# Altium PCB ДФТВ.434519.003.101.PcbDoc (part 3 of 3)
Units mm, origin at the board's own origin, x right, y up, seen from the top; angles counter-clockwise.
Board outline 82.5 x 70 mm, 2 copper layers (Top Layer, Bottom Layer), stack 1.491 mm thick; 90 components, 67 nets, 446 pads, 341 vias.
Unrouted connection lines stored in the file: 55.
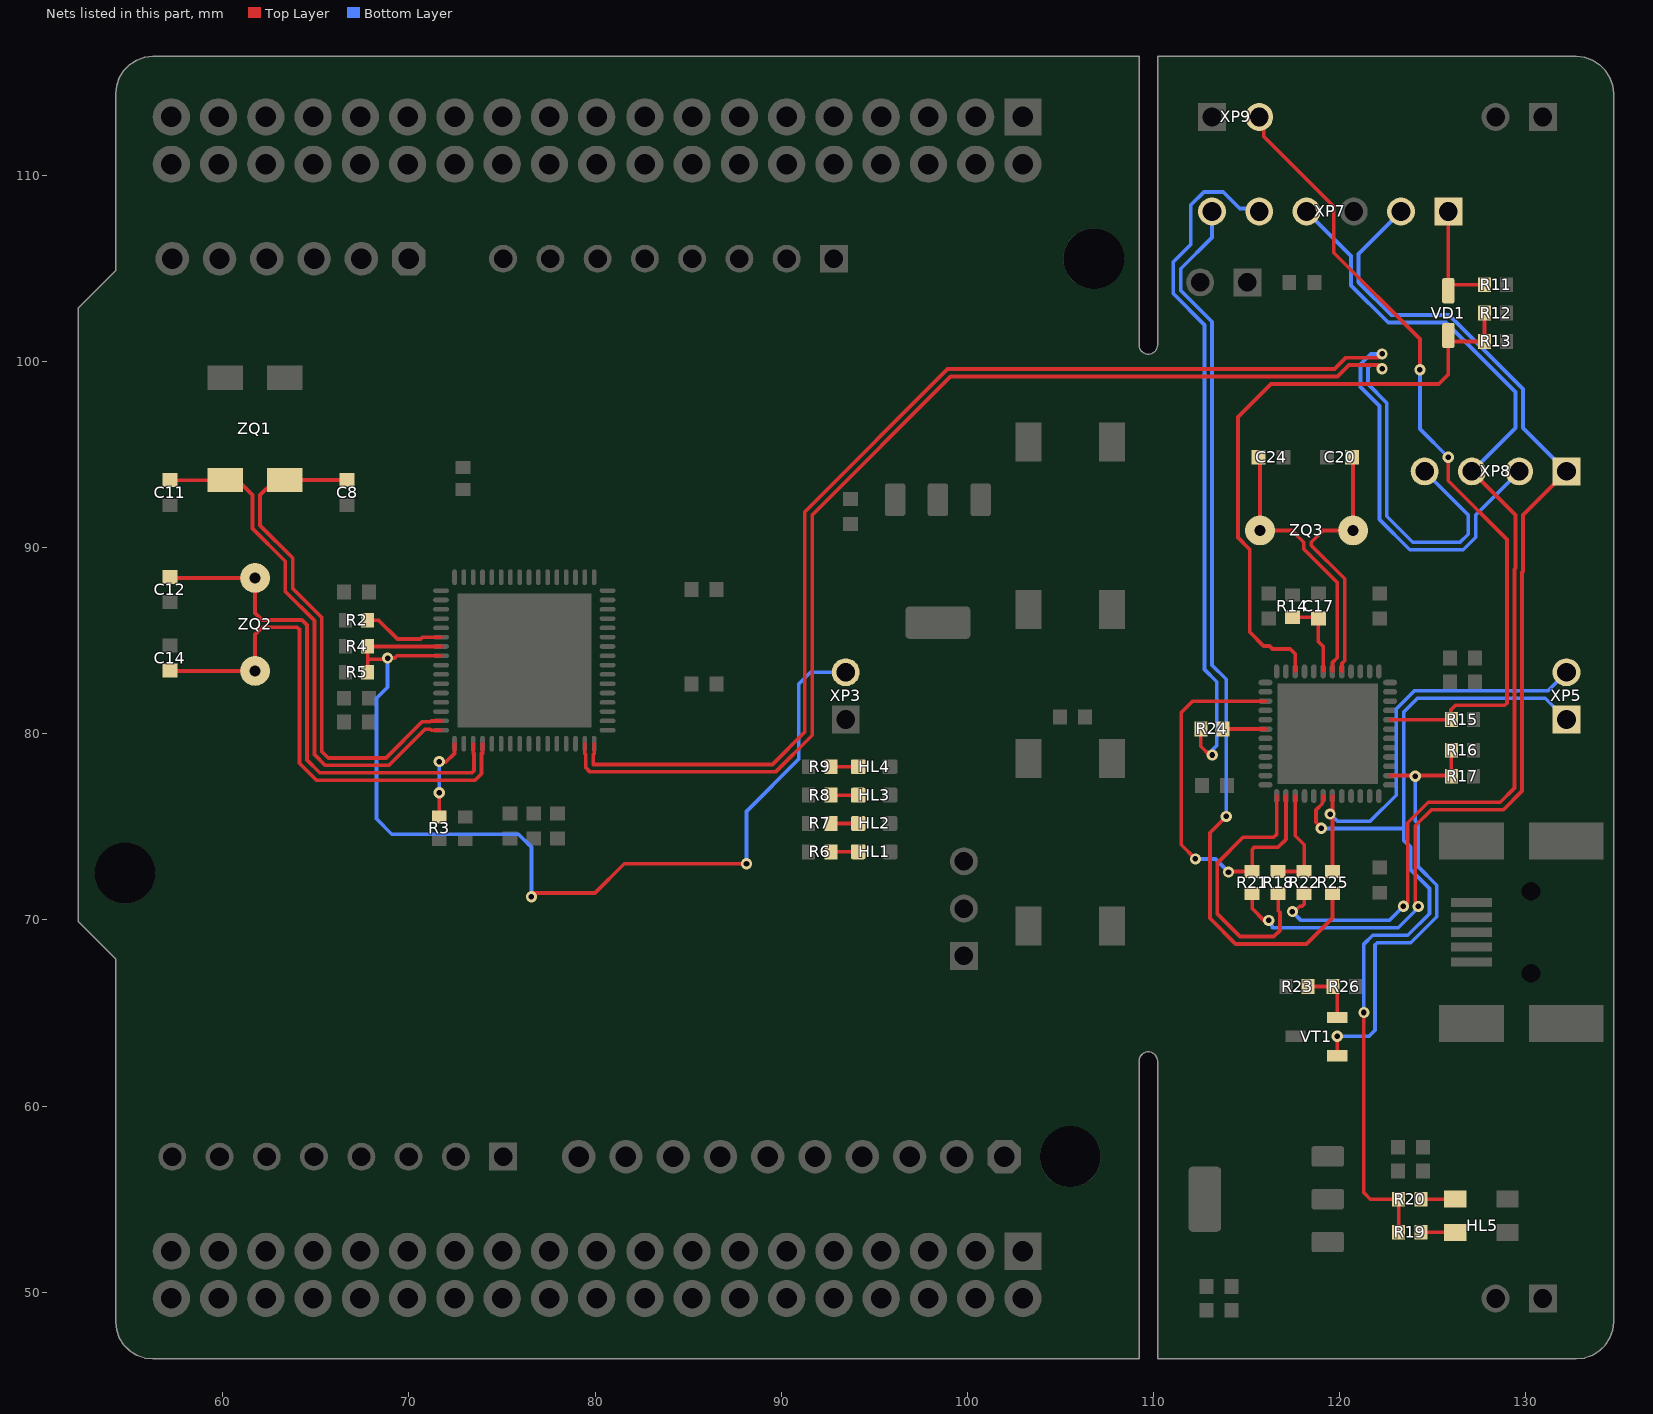
[diagram p2: the nets of this part, all layers, seen from the top]

## Via types
v1: diameter 0.6, hole 0.3, Top Layer to Bottom Layer, tented both sides, 280 vias
v2: diameter 0.8, hole 0.35, Top Layer to Bottom Layer, tented bottom, 36 vias
v3: diameter 0.66, hole 0.3, Top Layer to Bottom Layer, tented both sides, 25 vias

## Nets (pads, with @x,y where several pads share a name; then routed paths per layer and width w, separated by ;. In a path a pad name is that pad's centre, name@x,y a point inside that pad or via, vN(x,y) a via of type N, cw(c..) or ccw(c..) an arc to the next point about the centre after c; other vN are vias at no path point) (continued)
LED_ST: R19.1 R20.1 XP5.1 | length 48.7
  Top Layer w0.2: v1(119.03,74.93) 119.03,74.962 118.745,75.247 118.745,75.914 119.08,76.249 119.08,76.358 119.13,76.408 119.13,76.66 ; v1(121.32,65.024) 121.32,55.337 121.666,54.991 R20.1@123.19,54.991 R19.1@123.19,53.213
  Bottom Layer w0.2: v1(119.03,74.93) 119.049,74.911 123.444,74.911 123.463,74.93 ; v1(121.32,65.024) 121.32,68.704 121.793,69.177 123.679,69.177 124.841,70.339 124.841,71.697 123.825,72.713 123.825,73.914 123.463,74.276 123.463,74.93 ; XP5.1@132.207,80.772 131.064,81.915 124.206,81.915 123.463,81.172 123.463,74.93
NetC8_2: C8.2 ZQ1.1 | length 27.5
  Top Layer w0.2: C8.2@66.675,93.639 66.671,93.643 ZQ1.1@63.322,93.643 63.222,93.543 62.701,93.543 61.995,92.837 61.995,91.206 63.754,89.447 63.754,87.815 65.316,86.253 65.316,79.053 65.659,78.71 68.763,78.71 70.7,80.647 71.15,80.647 71.2,80.697 71.725,80.697
NetC11_2: C11.2 ZQ1.4 | length 28
  Top Layer w0.2: C11.2@57.15,93.639 60.118,93.639 ZQ1.4@60.122,93.643 60.222,93.543 60.889,93.543 61.595,92.837 61.595,91.04 63.354,89.281 63.354,87.649 64.916,86.087 64.916,78.887 65.493,78.31 68.929,78.31 70.866,80.247 71.15,80.247 71.2,80.197 71.725,80.197
NetC12_2: C12.2 ZQ2.1 | length 27.6
  Top Layer w0.2: C12.2@57.15,88.432 57.199,88.383 ZQ2.1@61.727,88.383 61.727,86.501 62.103,86.125 64.243,86.125 64.516,85.852 64.516,78.592 65.199,77.91 73.383,77.91 73.5,78.027 73.5,78.947 73.45,78.947 73.45,79.472
NetC14_2: C14.2 ZQ2.3 | length 28.3
  Top Layer w0.2: C14.2@57.15,83.399 57.166,83.383 ZQ2.3@61.727,83.383 61.727,85.349 62.103,85.725 63.999,85.725 64.116,85.608 64.116,78.427 65.033,77.51 73.549,77.51 73.9,77.861 73.9,78.066 73.9,78.947 73.95,78.947 73.95,79.472
NetC17_2: C17.2 R14.1 | length 4.4
  Top Layer w0.2: R14.1@117.475,86.268 118.797,86.268 C17.2@118.872,86.193 118.872,84.963 119.13,84.705 119.13,83.36
NetC20_2: C20.2 ZQ3.1 | length 14.2
  Top Layer w0.2: 120.13,83.36 120.149,83.379 120.149,83.788 120.288,83.927 120.288,88.334 118.491,90.131 118.491,90.297 119.126,90.932 ZQ3.1@120.737,90.932 120.737,94.822 C20.2@120.69,94.869
NetC24_2: C24.2 ZQ3.3 | length 14.4
  Top Layer w0.2: C24.2@115.657,94.869 115.737,94.789 ZQ3.3@115.737,90.932 117.456,90.932 118.091,90.297 118.091,89.935 118.745,89.281 119.888,88.138 119.888,84.093 119.63,83.835 119.63,83.36
NetDD1_6: R2.2 | length 4.4
  Top Layer w0.2: R2.2@67.783,86.106 68.366,86.106 69.375,85.097 70.63,85.097 70.73,85.197 71.725,85.197
NetDD1_17: R3.1 | length 4.5
  Top Layer w0.2: R3.1@71.628,75.53 v1(71.628,76.835) ; v1(71.628,78.51) 71.652,78.486 71.976,78.486 72.44,78.95 72.44,79.462 72.45,79.472
  Bottom Layer w0.2: v1(71.628,76.835) v1(71.628,78.51)
NetDD2_38: R16.1 R17.1 VT1.1 | length 24.5
  Top Layer w0.2: VT1.1@119.89,62.704 v1(119.89,63.752) ; 122.73,77.76 125.983,77.76 R17.1@126.019,77.724 R16.1@126.019,79.121
  Bottom Layer w0.2: v1(119.89,63.752) 121.602,63.752 121.92,64.07 121.92,68.66 122.037,68.777 123.845,68.777 125.241,70.173 125.241,71.863 124.225,72.879 124.225,75.174 124.079,75.32 v1(124.079,77.724)
NetHL1_A: HL1.A R6.1 | length 1.5
  Top Layer w0.2: R6.1@92.675,73.66 HL1.A@94.146,73.66
NetHL2_A: HL2.A R7.1 | length 1.5
  Top Layer w0.2: R7.1@92.675,75.184 HL2.A@94.146,75.184
NetHL3_A: HL3.A R8.1 | length 1.5
  Top Layer w0.2: R8.1@92.675,76.708 HL3.A@94.146,76.708
NetHL4_A: HL4.A R9.1 | length 1.5
  Top Layer w0.2: R9.1@92.675,78.232 HL4.A@94.146,78.232
NetHL5_2: HL5.2 R19.2 | length 1.8
  Top Layer w0.2: R19.2@124.39,53.213 126.224,53.213 HL5.2@126.235,53.202
NetHL5_3: HL5.3 R20.2 | length 1.8
  Top Layer w0.2: R20.2@124.39,54.991 126.224,54.991 HL5.3@126.235,55.002
NetR11_1: R11.1 VD1.A XP7.1 | length 6.3
  Top Layer w0.2: VD1.A@125.857,103.816 VD1.A@125.857,103.915 ; XP7.1@125.857,108.077 VD1.A@125.857,103.915 ; R11.1@127.797,104.14 126.082,104.14 VD1.A@125.857,103.915
NetR23_1: R23.1 R26.2 VT1.2 | length 3.1
  Top Layer w0.2: R23.1@118.329,66.421 R26.2@119.669,66.421 119.89,66.2 VT1.2@119.89,64.754
RST: R24.2 XP7.5 | length 37.2
  Top Layer w0.2: R24.2@112.557,80.264 112.557,79.34 113.03,78.867 v1(113.175,78.867)
  Bottom Layer w0.2: v1(113.175,78.867) 113.175,79.139 113.411,79.375 113.411,82.804 112.757,83.458 112.757,101.981 111.072,103.666 111.072,105.357 112.014,106.299 112.014,108.419 112.722,109.127 113.758,109.127 114.647,108.238 115.536,108.238 XP7.5@115.697,108.077
RSTM: R24.1 | length 2.3
  Top Layer w0.2: R24.1@113.757,80.264 113.761,80.26 116.03,80.26
Rx: R25.1 XP5.2 | length 22.9
  Top Layer w0.2: 119.63,76.66 119.63,72.613 R25.1@119.634,72.609
  Bottom Layer w0.2: v1(119.507,75.692) 119.888,75.311 121.666,75.311 123.063,76.708 123.063,81.338 124.04,82.315 131.21,82.315 XP5.2@132.207,83.312
S1: R4.2 R5.2 XP3.2 | length 55.2
  Top Layer w0.2: R5.2@67.783,83.312 67.783,84.01 ; v1(68.85,84.074) 68.787,84.01 67.783,84.01 ; v1@69.123,84.074 69.219,84.074 69.342,84.197 71.725,84.197 ; 71.725,84.697 67.795,84.697 R4.2@67.783,84.709 67.783,84.01 ; v1@76.778,71.444 79.99,71.444 81.571,73.025 v1(88.138,73.025)
  Bottom Layer w0.2: v1(68.85,84.074) 68.85,82.51 68.25,81.91 68.25,75.434 69.077,74.607 75.888,74.607 76.581,73.914 v1(76.581,71.244) ; v1(88.138,73.025) 88.138,75.831 90.951,78.644 90.951,82.677 91.586,83.312 XP3.2@93.472,83.312
SWC: R21.2 XP7.2 XP8.1 | length 61.2
  Top Layer w0.2: R21.2@115.316,71.409 115.316,70.612 115.951,69.977 v1(116.21,69.977) ; v1(124.241,70.729) 124.241,70.777 124.079,70.939 124.079,75.057 124.949,75.927 128.817,75.927 129.813,76.923 129.813,88.68 129.867,88.734 129.867,91.767 XP8.1@132.207,94.107
  Bottom Layer w0.2: v1(116.21,69.977) 116.21,69.869 116.4,69.679 116.4,69.577 123.166,69.577 124.241,70.652 v1(124.241,70.729) ; XP7.2@123.317,108.077 121.031,105.791 121.031,104.267 122.79,102.508 125.896,102.508 129.867,98.537 129.867,96.447 XP8.1@132.207,94.107
SWCM: R21.1 | length 21.9
  Top Layer w0.2: v1(112.268,73.279) 111.506,74.041 111.506,81.153 112.113,81.76 116.03,81.76 ; v1(114.046,72.574) 114.081,72.609 R21.1@115.316,72.609 115.316,73.787 115.443,73.914 116.713,73.914 117.13,74.331 117.13,76.66
  Bottom Layer w0.2: v1(112.268,73.279) 113.341,73.279 v1(114.046,72.574)
SWCT: XP8.2 | length 80.4
  Top Layer w0.2: 79.95,79.472 79.95,78.947 79.9,78.897 79.9,78.359 89.535,78.359 91.27,80.094 91.27,91.932 98.944,99.606 119.741,99.606 120.357,100.222 122.101,100.222 v1(122.301,100.422)
  Bottom Layer w0.2: v1(122.301,100.422) 121.7,100.422 121.139,99.861 121.139,98.64 122.155,97.624 122.155,91.528 123.786,89.897 126.658,89.897 127.327,90.566 127.327,91.767 XP8.2@129.667,94.107
SWD: R22.2 XP7.4 XP8.3 | length 58.4
  Top Layer w0.2: v1(117.475,70.45) 117.583,70.45 117.872,70.739 117.991,70.739 118.11,70.858 R22.2@118.11,71.409 ; v1(123.441,70.739) 123.479,70.739 123.679,70.939 123.679,75.223 124.783,76.327 128.651,76.327 129.413,77.089 129.413,88.846 129.467,88.9 129.467,91.767 XP8.3@127.127,94.107
  Bottom Layer w0.2: v1(117.475,70.45) 117.948,69.977 122.689,69.977 123.441,70.729 v1(123.441,70.739) ; XP7.4@118.237,108.077 120.631,105.683 120.631,104.101 122.624,102.108 125.73,102.108 129.467,98.371 129.467,96.447 XP8.3@127.127,94.107
SWDM: R18.2 R22.1 | length 5.6
  Top Layer w0.2: R18.2@116.713,72.609 R22.1@118.11,72.609 118.11,74.041 117.63,74.521 117.63,76.66
SWDT: XP8.4 | length 79.1
  Top Layer w0.2: 79.45,79.472 79.45,78.947 79.5,78.897 79.5,78.193 79.734,77.959 88.05,77.959 89.701,77.959 91.67,79.929 91.67,91.767 99.11,99.206 119.907,99.206 120.523,99.822 122.101,99.822 v1(122.301,99.622)
  Bottom Layer w0.2: v1(122.301,99.622) 122.101,99.822 121.666,99.822 121.539,99.695 121.539,98.806 122.555,97.79 122.555,91.694 123.952,90.297 126.492,90.297 126.927,90.732 126.927,91.767 XP8.4@124.587,94.107
SWO: R25.2 XP7.6 | length 49.1
  Top Layer w0.2: v1(113.919,75.565) 113.046,74.692 113.046,70.088 114.427,68.707 118.237,68.707 119.634,70.104 R25.2@119.634,71.409
  Bottom Layer w0.2: XP7.6@113.157,108.077 113.157,106.68 111.472,104.995 111.472,103.832 113.157,102.147 113.157,83.693 113.919,82.931 v1(113.919,75.565)
T1: R12.1 R13.1 VD1.K | length 33.3
  Top Layer w0.2: 117.63,83.36 117.63,84.3 117.367,84.563 116.409,84.563 116.244,84.728 115.932,84.728 115.189,85.471 115.189,89.916 114.554,90.551 114.554,97.028 116.332,98.806 125.349,98.806 125.857,99.314 125.857,101.092 125.97,101.204 126.082,101.092 R13.1@127.797,101.092 R12.1@127.797,102.616
T2: R15.1 XP9.2 | length 44
  Top Layer w0.2: XP9.2@115.697,113.157 115.936,112.918 115.936,112.107 119.697,108.346 119.697,105.855 124.333,101.219 v1(124.333,99.568) ; 122.73,80.76 126.007,80.76 R15.1@126.019,80.772 125.984,80.772 125.984,81.28 126.238,81.534 128.896,81.534 129.013,81.651 129.013,90.443 125.857,93.599 v1(125.857,94.869)
  Bottom Layer w0.2: v1(124.333,99.568) 124.333,96.393 v1(125.857,94.869)
T3: R18.1 | length 14.6
  Top Layer w0.2: 116.63,76.66 116.63,74.593 116.481,74.444 114.83,74.444 113.446,73.06 113.446,70.323 114.662,69.107 116.478,69.107 116.81,69.439 116.81,70.395 116.713,70.492 R18.1@116.713,71.409
pads on no net: DA1.0 DA2.0 DD1.0 DD1.1 DD1.2 DD1.3 DD1.4 DD1.5 DD1.6 DD1.7 DD1.8 DD1.9 DD1.10 DD1.11 DD1.12 DD1.13 DD1.14 DD1.15 DD1.16 DD1.17 DD1.18 DD1.19 DD1.20 DD1.21 DD1.22 DD1.23 DD1.24 DD1.25 DD1.26 DD1.27 DD1.28 DD1.29 DD1.30 DD1.31 DD1.32 DD1.33 DD1.34 DD1.35 DD1.36 DD1.37 DD1.38 DD1.39 DD1.40 DD1.41 DD1.42 DD1.43 DD1.44 DD1.45 DD1.46 DD1.47 DD1.48 DD1.49 DD1.50 DD1.51 DD1.52 DD1.53 DD1.54 DD1.55 DD1.56 DD1.57 DD1.58 DD1.59 DD1.60 DD1.61 DD1.62 DD1.63 DD1.64 DD2.0 DD2.1 DD2.2 DD2.3 DD2.4 DD2.5 DD2.6 DD2.7 DD2.8 DD2.9 DD2.10 DD2.11 DD2.12 DD2.13 DD2.14 DD2.15 DD2.16 DD2.17 DD2.18 DD2.19 DD2.20 DD2.21 DD2.22 DD2.23 DD2.24 DD2.25 DD2.26 DD2.27 DD2.28 DD2.29 DD2.30 DD2.31 DD2.32 DD2.33 DD2.34 DD2.35 DD2.36 DD2.37 DD2.38 DD2.39 DD2.40 DD2.41 DD2.42 DD2.43 DD2.44 DD2.45 DD2.46 DD2.47 DD2.48 HL1.0 HL2.0 HL3.0 HL4.0 HL5. SB1.3 SB1.4 SB2.3 SB2.4 VD1.0 XP1.1 XP1.2 XP1.3 XP1.4 XP1.5 XP1.6 XP1.7 XP1.8 XP1.9 XP1.10 XP1.25 XP1.26 XS1.1 XS5. ZQ1.2 ZQ1.3
copper on no net:
  other v2: 73.45,81.197 74.55,81.197 75.65,81.197 76.75,81.197 77.85,81.197 78.95,81.197 73.45,82.297 74.55,82.297 75.65,82.297 76.75,82.297 77.85,82.297 78.95,82.297 73.45,83.397 74.55,83.397 75.65,83.397 76.75,83.397 77.85,83.397 78.95,83.397 73.45,84.497 74.55,84.497 75.65,84.497 76.75,84.497 77.85,84.497 78.95,84.497 73.45,85.597 74.55,85.597 75.65,85.597 76.75,85.597 77.85,85.597 78.95,85.597 73.45,86.697 74.55,86.697 75.65,86.697 76.75,86.697 77.85,86.697 78.95,86.697
  other v3: 117.18,77.81 118.28,77.81 119.38,77.81 120.48,77.81 121.58,77.81 117.18,78.91 118.28,78.91 119.38,78.91 120.48,78.91 121.58,78.91 117.18,80.01 118.28,80.01 119.38,80.01 120.48,80.01 121.58,80.01 117.18,81.11 118.28,81.11 119.38,81.11 120.48,81.11 121.58,81.11 117.18,82.21 118.28,82.21 119.38,82.21 120.48,82.21 121.58,82.21

## Polygon pours and split planes (outlines as drawn)
GND on Bottom Layer "GND_L01_P003" (solid, pour order 3): 132.737,46.407 133.182,46.457 133.605,46.605 133.984,46.843 134.301,47.16 134.539,47.539 134.687,47.962 134.737,48.407 134.737,114.407 134.687,114.852 134.539,115.275 134.301,115.654 133.984,115.971 133.605,116.209 133.182,116.357 132.737,116.407 110.237,116.407 110.237,100.907 110.226,100.803 110.194,100.704 110.142,100.613 110.072,100.535 109.987,100.474 109.892,100.431 109.789,100.41 109.685,100.41 109.582,100.431 109.487,100.474 109.402,100.535 109.332,100.613 109.28,100.704 109.248,100.803 109.237,100.907 109.237,116.407 56.237,116.407 55.792,116.357 55.369,116.209 54.99,115.971 54.673,115.654 54.435,115.275 54.287,114.852 54.237,114.407 54.237,104.907 52.237,102.907 52.237,69.907 54.237,67.907 54.237,48.407 54.287,47.962 54.435,47.539 54.673,47.16 54.99,46.843 55.369,46.605 55.792,46.457 56.237,46.407 109.237,46.407 109.237,62.407 109.248,62.511 109.28,62.61 109.332,62.701 109.402,62.779 109.487,62.84 109.582,62.883 109.685,62.904 109.789,62.904 109.892,62.883 109.987,62.84 110.072,62.779 110.142,62.701 110.194,62.61 110.226,62.511 110.237,62.407 110.237,46.407
GND on Top Layer "GND_L02_P001" (solid, pour order 1): 132.737,46.407 133.182,46.457 133.605,46.605 133.984,46.843 134.301,47.16 134.539,47.539 134.687,47.962 134.737,48.407 134.737,114.407 134.687,114.852 134.539,115.275 134.301,115.654 133.984,115.971 133.605,116.209 133.182,116.357 132.737,116.407 110.237,116.407 110.237,100.907 110.226,100.803 110.194,100.704 110.142,100.613 110.072,100.535 109.987,100.474 109.892,100.431 109.789,100.41 109.685,100.41 109.582,100.431 109.487,100.474 109.402,100.535 109.332,100.613 109.28,100.704 109.248,100.803 109.237,100.907 109.237,116.407 56.237,116.407 55.792,116.357 55.369,116.209 54.99,115.971 54.673,115.654 54.435,115.275 54.287,114.852 54.237,114.407 54.237,104.907 52.237,102.907 52.237,69.907 54.237,67.907 54.237,48.407 54.287,47.962 54.435,47.539 54.673,47.16 54.99,46.843 55.369,46.605 55.792,46.457 56.237,46.407 109.237,46.407 109.237,62.407 109.248,62.511 109.28,62.61 109.332,62.701 109.402,62.779 109.487,62.84 109.582,62.883 109.685,62.904 109.789,62.904 109.892,62.883 109.987,62.84 110.072,62.779 110.142,62.701 110.194,62.61 110.226,62.511 110.237,62.407 110.237,46.407

## Keep-outs
Keep-Out Layer:
  lines w0.2: 52.237,69.907 54.237,67.907 ; 52.237,69.907 52.237,102.907 ; 52.237,69.907 54.237,67.907 ; 52.237,69.907 52.237,102.907 ; 52.237,102.907 54.237,104.907 ; 52.237,102.907 54.237,104.907 ; 54.237,48.407 54.287,47.962 ; 54.237,48.407 54.237,67.907 ; 54.237,48.407 54.287,47.962 ; 54.237,48.407 54.237,67.907 ; 54.237,104.907 54.237,114.407 ; 54.237,104.907 54.237,114.407 ; 54.237,114.407 54.287,114.852 ; 54.237,114.407 54.287,114.852 ; 54.287,47.962 54.435,47.539 ; 54.287,47.962 54.435,47.539 ; 54.287,114.852 54.435,115.275 ; 54.287,114.852 54.435,115.275 ; 54.435,47.539 54.673,47.16 ; 54.435,47.539 54.673,47.16 ; 54.435,115.275 54.673,115.654 ; 54.435,115.275 54.673,115.654 ; 54.673,47.16 54.99,46.843 ; 54.673,47.16 54.99,46.843 ; 54.673,115.654 54.99,115.971 ; 54.673,115.654 54.99,115.971 ; 54.99,46.843 55.369,46.605 ; 54.99,46.843 55.369,46.605 ; 54.99,115.971 55.369,116.209 ; 54.99,115.971 55.369,116.209 ; 55.369,46.605 55.792,46.457 ; 55.369,46.605 55.792,46.457 ; 55.369,116.209 55.792,116.357 ; 55.369,116.209 55.792,116.357 ; 55.792,46.457 56.237,46.407 ; 55.792,46.457 56.237,46.407 ; 55.792,116.357 56.237,116.407 ; 55.792,116.357 56.237,116.407 ; 56.237,46.407 109.237,46.407 ; 56.237,46.407 109.237,46.407 ; 56.237,116.407 109.237,116.407 ; 56.237,116.407 109.237,116.407 ; 109.237,46.407 109.237,62.407 ; 109.237,46.407 109.237,62.407 ; 109.237,62.407 109.248,62.511 ; 109.237,62.407 109.248,62.511 ; 109.237,100.907 109.237,116.407 ; 109.237,100.907 109.248,100.803 ; 109.237,100.907 109.237,116.407 ; 109.237,100.907 109.248,100.803 ; 109.248,62.511 109.28,62.61 ; 109.248,62.511 109.28,62.61 ; 109.248,100.803 109.28,100.704 ; 109.248,100.803 109.28,100.704 ; 109.28,62.61 109.332,62.701 ; 109.28,62.61 109.332,62.701 ; 109.28,100.704 109.332,100.613 ; 109.28,100.704 109.332,100.613 ; 109.332,62.701 109.402,62.779 ; 109.332,62.701 109.402,62.779 ; 109.332,100.613 109.402,100.535 ; 109.332,100.613 109.402,100.535 ; 109.402,62.779 109.487,62.84 ; 109.402,62.779 109.487,62.84 ; 109.402,100.535 109.487,100.474 ; 109.402,100.535 109.487,100.474 ; 109.487,62.84 109.582,62.883 ; 109.487,62.84 109.582,62.883 ; 109.487,100.474 109.582,100.431 ; 109.487,100.474 109.582,100.431 ; 109.582,62.883 109.685,62.904 ; 109.582,62.883 109.685,62.904 ; 109.582,100.431 109.685,100.41 ; 109.582,100.431 109.685,100.41 ; 109.685,62.904 109.789,62.904 ; 109.685,62.904 109.789,62.904 ; 109.685,100.41 109.789,100.41 ; 109.685,100.41 109.789,100.41 ; 109.789,62.904 109.892,62.883 ; 109.789,62.904 109.892,62.883 ; 109.789,100.41 109.892,100.431 ; 109.789,100.41 109.892,100.431 ; 109.892,62.883 109.987,62.84 ; 109.892,62.883 109.987,62.84 ; 109.892,100.431 109.987,100.474 ; 109.892,100.431 109.987,100.474 ; 109.987,62.84 110.072,62.779 ; 109.987,62.84 110.072,62.779 ; 109.987,100.474 110.072,100.535 ; 109.987,100.474 110.072,100.535 ; 110.072,62.779 110.142,62.701 ; 110.072,62.779 110.142,62.701 ; 110.072,100.535 110.142,100.613 ; 110.072,100.535 110.142,100.613 ; 110.142,62.701 110.194,62.61 ; 110.142,62.701 110.194,62.61 ; 110.142,100.613 110.194,100.704 ; 110.142,100.613 110.194,100.704 ; 110.194,62.61 110.226,62.511 ; 110.194,62.61 110.226,62.511 ; 110.194,100.704 110.226,100.803 ; 110.194,100.704 110.226,100.803 ; 110.226,62.511 110.237,62.407 ; 110.226,62.511 110.237,62.407 ; 110.226,100.803 110.237,100.907 ; 110.226,100.803 110.237,100.907 ; 110.237,46.407 132.737,46.407 ; 110.237,46.407 110.237,62.407 ; 110.237,46.407 132.737,46.407 ; 110.237,46.407 110.237,62.407 ; 110.237,100.907 110.237,116.407 ; 110.237,100.907 110.237,116.407 ; 110.237,116.407 132.737,116.407 ; 110.237,116.407 132.737,116.407 ; 132.737,46.407 133.182,46.457 ; 132.737,46.407 133.182,46.457 ; 132.737,116.407 133.182,116.357 ; 132.737,116.407 133.182,116.357 ; 133.182,46.457 133.605,46.605 ; 133.182,46.457 133.605,46.605 ; 133.182,116.357 133.605,116.209 ; 133.182,116.357 133.605,116.209 ; 133.605,46.605 133.984,46.843 ; 133.605,46.605 133.984,46.843 ; 133.605,116.209 133.984,115.971 ; 133.605,116.209 133.984,115.971 ; 133.984,46.843 134.301,47.16 ; 133.984,46.843 134.301,47.16 ; 133.984,115.971 134.301,115.654 ; 133.984,115.971 134.301,115.654 ; 134.301,47.16 134.539,47.539 ; 134.301,47.16 134.539,47.539 ; 134.301,115.654 134.539,115.275 ; 134.301,115.654 134.539,115.275 ; 134.539,47.539 134.687,47.962 ; 134.539,47.539 134.687,47.962 ; 134.539,115.275 134.687,114.852 ; 134.539,115.275 134.687,114.852 ; 134.687,47.962 134.737,48.407 ; 134.687,47.962 134.737,48.407 ; 134.687,114.852 134.737,114.407 ; 134.687,114.852 134.737,114.407 ; 134.737,48.407 134.737,114.407 ; 134.737,48.407 134.737,114.407 ; 109.237,66.457 109.237,73.787 109.248,73.891 109.28,73.99 109.332,74.081 109.402,74.159 109.487,74.22 109.582,74.263 109.685,74.284 109.789,74.284 109.892,74.263 109.987,74.22 110.072,74.159 110.142,74.081 110.194,73.99 110.226,73.891 110.237,73.787 110.237,66.457 110.226,66.353 110.194,66.254 110.142,66.163 110.072,66.085 109.987,66.024 109.892,65.981 109.789,65.96 109.685,65.96 109.582,65.981 109.487,66.024 109.402,66.085 109.332,66.163 109.28,66.254 109.248,66.353 109.237,66.457 ; 109.237,78.407 109.248,78.303 109.28,78.204 109.332,78.113 109.402,78.035 109.487,77.974 109.582,77.931 109.685,77.91 109.789,77.91 109.892,77.931 109.987,77.974 110.072,78.035 110.142,78.113 110.194,78.204 110.226,78.303 110.237,78.407 110.237,97.407 110.226,97.511 110.194,97.61 110.142,97.701 110.072,97.779 109.987,97.84 109.892,97.883 109.789,97.904 109.685,97.904 109.582,97.883 109.487,97.84 109.402,97.779 109.332,97.701 109.28,97.61 109.248,97.511 109.237,97.407 109.237,78.407

## Other copper
Bottom Layer:
  rectangle: 72.517,80.391 80.017,87.503
  rectangle net GND: 116.586,76.962 122.301,82.804

## Silkscreen, mask and mechanical layers (free items; w line width, h text height)
Top Overlay:
  drawing of 590 lines, arcs and shapes, not listed
  text "REV 1.0" at 119.253,114.808 h1.52
  text "BOOT_MODE" at 111.125,110.878 h1
  text "SWD" at 127.516,109.22 h1 r270
  text "VIN" at 74.991,103.684 h1 r270
  text "GND" at 77.403,103.685 h1 r270
  text "GND" at 80.07,103.685 h1 r270
  text "5V" at 82.611,103.684 h1 r270
  text "3V3" at 85.151,103.685 h1 r270
  text "NRST" at 87.563,103.685 h1 r270
  text "IOREF" at 90.096,103.685 h1 r270
  text "A5" at 57.023,103.504 h1 r270
  text "A4" at 59.436,103.504 h1 r270
  text "A3" at 62.103,103.504 h1 r270
  text "A2" at 64.643,103.504 h1 r270
  text "A1" at 67.183,103.504 h1 r270
  text "A0" at 69.73,103.504 h1 r270
  text "RX" at 112.014,102.597 h1 r270
  text "Tx" at 114.808,102.598 h1 r270
  text "Кнопка" at 107.569,101.726 h1 r270
  text "AIN" at 66.676,101.099 h1
  text "POWER" at 78.233,100.592 h1
  text "MILUINO" at 91.821,98.999 h4.55
  text "АО \"ПКК МИЛАНДР\"® ™" at 69.85,98.977 h2
  text "RXI" at 131.319,85.09 h1
  text "TXI" at 131.445,77.47 h1
  text "3V3 EX" at 101.481,75.057 h1 r270
  text "3V3 USB" at 101.481,70.358 h1 r270
  text "RESET" at 107.569,67.929 h1 r270
  text "PWM/MOSI/D11" at 86.495,66.547 h1 r270
  text "PWM/CS/D10" at 83.82,65.677 h1 r270
  text "MISO/D12" at 88.908,63.881 h1 r270
  text "PWM/D9" at 81.415,63.583 h1 r270
  text "SDA/D14" at 99.187,63.497 h1 r270
  text "PWM/D5" at 69.604,63.372 h1 r270
  text "PWM/D6" at 72.144,63.361 h1 r270
  text "PWM/D3" at 64.651,63.327 h1 r270
  text "SCK/D13" at 91.44,63.325 h1 r270
  text "SCL/D15" at 101.727,63.231 h1 r270
  text "RX/D0" at 57.03,62.236 h1 r270
  text "AVDD" at 96.528,62.212 h1 r270
  text "TX/D1" at 59.563,61.71 h1 r270
  text "GND" at 93.987,61.277 h1 r270
  text "D8" at 78.867,60.533 h1 r270
  text "D2" at 61.976,60.386 h1 r270
  text "D4" at 67.056,60.288 h1 r270
  text "D7" at 74.676,60.217 h1 r270
  text "MILUINO" at 131.601,59.69 h2 r270
  text "RX" at 102.381,53.721 h1
  text "Tx" at 102.362,47.371 h1
Top Component Outline:
  circle w0.254: c61.722,99.441 r0.18
  lines w0.1: 59.436,93.179 59.436,94.322 ; 59.436,98.679 59.436,99.822 59.69,99.822 59.69,98.679 ; 59.69,93.179 59.69,94.322 ; 59.944,93.179 58.928,93.179 58.928,94.322 59.944,94.322 ; 59.972,92.393 59.972,93.179 ; 59.972,94.322 59.972,94.893 ; 59.972,97.893 59.972,98.679 59.944,98.679 58.928,98.679 58.928,99.822 59.944,99.822 59.972,99.822 59.972,100.393 ; 60.579,93.218 62.865,93.218 ; 60.579,93.543 62.865,93.543 ; 63.472,92.393 63.472,93.179 ; 63.472,94.322 63.472,94.893 ; 63.472,97.893 63.472,98.679 ; 63.472,99.822 63.472,100.393 ; 63.5,93.179 64.516,93.179 64.516,94.322 63.5,94.322 ; 63.5,98.679 64.516,98.679 64.516,99.822 63.5,99.822 ; 63.754,93.179 63.754,94.322 ; 63.754,98.679 63.754,99.822 ; 64.008,93.179 64.008,94.322 ; 64.008,98.679 64.008,99.822 ; 60.579,92.71 62.865,92.71 62.865,100.076 60.579,100.076 60.579,92.71
Mechanical 7:
  lines w0.1: 616.331,2293.366 616.458,2293.366 ; 626.364,2352.04 626.491,2352.04 ; 616.458,2353.206 616.458,2353.206
  lines w0.6: 616.458,2290.064 616.458,2271.164 626.491,2271.164 626.491,2290.064 ; 616.458,2293.366 616.458,2317.584 626.491,2317.584 626.491,2293.087
  text "BOASFORMAT|А3|1|0|883070867|165354330|1000000000|2:1|" at 0,2540 h0
  text "BOASFORMAT|А3|101|165354330|883070867|330708660|1000000000|2:1|" at 420,2540 h0
  text "DimLitera|771800000|817150000|-6050000|-4300000|1|||поз.45||0|0|False" at 721.995,2497.328 h0
  text "DimPos|245550000|976600000|-4750000|-6200000|47|3376911" at 635.762,2496.312 h0
  text "DimPos|233200000|970000000|8250000|-12600000|51|2853769" at 571.373,2495.804 h0
  text "DimPos|241250000|973100000|9800000|-9350000|57|3379850" at 587.883,2495.423 h0
  text "DimPos|197850000|970700000|2900000|-11650000|63|3033048" at 495.173,2495.169 h0
  text "DimPos|207450000|977250000|4500000|-5100000|49|3244656" at 515.493,2495.169 h0
  text "DimPos|215200000|971450000|5400000|-10900000|65|3247595" at 532.892,2495.169 h0
  text "DimV|-250000|-55200000|19900000|979800000|-7150000|-36000000|2||||js12|False|False|False|False" at 50.546,2488.692 h0
  text "DimD|59168509|971259057|-7631491|-4390943|1288188|2|3 отв.|||js12|False|False|False|False|2" at 169.672,2478.151 h0
  text "DimLitera|772436614|814668660|-7263386|5918660|1|||Паять по СТО 1.2.2010||1|2|False" at 726.694,2465.07 h0
  text "DimLitera|760800000|800550000|-3900000|-4350000|1|||поз.51||0|0|False" at 688.594,2455.291 h0
  text "DimPos|246800000|962350000|-3800000|-4150000|55|3203510" at 636.524,2454.91 h0
  text "DimLitera|796450000|801000000|-5300000|-3600000|1|||поз. 65 и 67||0|0|False" at 782.701,2454.529 h0
  text "DimPos|191200000|958200000|9450000|-5600000|71|2509906" at 461.645,2448.052 h0
  text "DimH|-64950000|6350000|81200000|962700000|-24450000|21700000|2||||js12|False|False|False|False" at 206.248,2445.258 h0
  text "DimPos|216050000|953550000|5750000|-9000000|51|2853769" at 534.162,2444.877 h0
  text "DimPos|238150000|959200000|-12450000|5100000|69|3291680" at 636.524,2423.414 h0
  text "DimLitera|761200000|798000000|-4600000|9850000|1|||Паять по СТО 1.2.2010||1|2|False" at 691.388,2412.746 h0
  text "DimLitera|791883382|796950576|-4216618|8800576|1|||Паять по СТО 1.2.2010||1|2|False" at 768.35,2412.746 h0
  text "DimPos|247100000|951650000|-3850000|2950000|51|2853769" at 637.413,2409.698 h0
  text "DimPos|196000000|932900000|2150000|13300000|65|3247595" at 492.379,2335.784 h0
  text "DimPos|205650000|926800000|3600000|7200000|49|3244656" at 513.207,2335.784 h0
  text "DimPos|220850000|941650000|11000000|22050000|53|2988963" at 533.019,2335.784 h0
  text "DimPos|223250000|932750000|6950000|13250000|61|2897854" at 549.402,2335.53 h0
  text "DimPos|246150000|926550000|-3850000|8150000|47|3376911" at 635,2332.736 h0
  text "DimLitera|226500000|912550000|-8800000|-5100000|1|||Граница|монтажа|1|0|False" at 597.662,2330.831 h0
  text "DimV|-50000|-1200000|16950000|914150000|-1600000|-1250000|2||||js12|False|False|False|False" at 43.053,2321.941 h0
  text "DimV|-49999|-9644504|183250000|912434647|-2100000|-7334647|2||||js12|False|False|False|False|2" at 465.455,2317.584 h0
  text "DimV|0|-9644501|184300001|912434644|-2850001|-8284644|2||||js12|False|False|False|False|2" at 468.122,2317.584 h0
  text "DimV|0|-1190142|249260637|902790143|4839363|-1940143|2||||js12|False|False|False|False|2" at 633.122,2293.087 h0
  text "DimV|0|-7874016|183200001|901600001|-2000001|-6350001|2||||js12|False|False|False|False|2" at 465.328,2290.064 h0
  text "DimV|0|-7440943|184300001|901600001|-2750001|-7150001|2||||js12|False|False|False|False|2" at 468.122,2290.064 h0
  text "SET2|Superlayer=MechanicalLayer7|Wsuperlayer=MechanicalLayer8|Layergrid=MechanicalLayer9|Werase=MechanicalLayer11|Layermark=MechanicalLayer12|Layerstamp=MechanicalLayer13|Gridline=0,18|Boardline=0,6|Contourpolygonline=0,6|PcbGridStep=1|PcbGridNumbering=False|PcbGridCleareanceAtView=0|PcbGridNumberEach=l4|PcbGridLineEach=l2|PcbGridCountSecondaryStrip=1|PcbGridEnabledStrip=True|PcbGridHorizontal90=False|PcbGridWhiteAreaBeforeText=True|PcbSignalGridEnabled=True|PcbSignalShowBukva=True|RealSignalLayerNames=False|PcbGridTextsEnabledBothSide=l2|PcbGridEnabledBothSide=l2|PcbPolarGridEnabled=False|PcbPolarGridAngleStep=10|PcbPolarGridRadialStep=10|PcbPolarGridCenterPcbGrid=False|SilkShowPad=False|SilkViewName=Слой маркировки|SilkShowHole=True|SilkShowAxis=True|SilkShowBukva=True|SilkShowGrid=False|SolderShowGrid=False|SolderViewName=Слой маски|SolderShowAxis=True|SolderShowBukva=False|MainViewShowGrid=False|MainViewMinDiameterHoles=2|MainViewUseShapesDrill=False|ShowBukvaOnSboky=True|ShowBukvaViews=True|Density=2,2|CustomHoleSizeFactor=1|PcbDoubleLineHeader=False|PcbAccuracy=a4|TableName=Таблица 1|RazrezWidth=100|RealLayerNames=False|RazrezShowBukva=True|RazrezBukva=А-А|Sher=Ra 6,3|Asstoplayer=MechanicalLayer3|Asstoplayer2=None|Assbottomlayer=MechanicalLayer4|Assbottomlayer2=None|AssMinDiameterHoles=2|AssDim=True|AssMech=False|AssSilk=False|AssComponentSilk=False|AssFreeSilk=False|AssSmdPads=False|AssGridEnable=False|AssShowBukva=True|Mirror=Horisontal|PcbGridFontSize=5|PcbGridCenterZero=False|TTStampDistance=12|MainFontSize=5|PolyShtrihEnable=True|RegionShtrihEnable=False|PolyStep=2|PcbDrillDrawingGridEnabled=False|PcbDrillDrawingViewName=Слой сверловки|PcbDrillDrawingShowBukva=True|PcbDrillDrawingShowAxis=True|PcbSignalLayersUseDrill=False|PcbSignalLayersUseWhiteHoles=True|PcbSignalLayersUseShapesDrill=False|PcbSignalLayersShowAxis=True|Thinline=0,18|Basicline=0,6" at 0,0.025 h0
  text "2TT0006#" at 0,0 h0
  text "2TT0005#  6. Элементы выводного монтажа поз. 47-57, 61-65, 69 и 71 паять проволокой ф0,5 мм. ПОС61 ГОСТ 21931-76 с применением флюса ФТС по ОСТ 4Г.0.033.200 объемом не более 2 мкл на точку пайки." at 0,0 h0
  text "2TT0004#  5. Элементы поверхностного монтажа паять паяльной пастой АВАНГАРД ПП-63-4-89СН0 ТУ 3439-002-07518266-2017." at 0,0 h0
  text "2TT0003#  4. Меры защиты от статического электричества по ОСТ 92-1615-74. Степень жесткости II по ОСТ11.073.062-2001." at 0,0 h0
  text "2TT0002#  3.** Размеры обеспеч. инстр." at 0,0 h0
  text "2TT0001#  2.* Размеры для справок." at 0,0 h0
  text "2TT0000#  1. Установку элементов производить по чертежу." at 0,0 h0
  text "TT0011#  11. Остальные ТТ по ОСТ4 Г0.070.015." at 0,0 h0
  text "TT0010#  Допускаются разрывы в маркировочных знаках, не искажающие восприятие информации." at 0,0 h0
  text "TT0009#  10. Маркировать маской Imagecure XV501T-4, цвет белый, фирма «SUN CHEMIKAL», с отвердителем CAWP2431. Попадание маркировочной краски на паяемые поверхности не допускается." at 0,0 h0
  text "TT0008#  9. Покрытие печатной платы маска Imagecure XV501T-4, цвет черный матовый, фирма «SUN CHEMIKAL», с отвердителем CAWN2539,  с двух сторон, кроме контактных площадок и монтажных отверстий. Допускается отсутствие покрытия вокруг контактных площадок на размере не более 0,125 мм и между контактными площадками при расстоянии между ними менее 0,125 мм." at 0,0 h0
  text "TT0007#  8. Допускается полное или частичное заполнение припоем переходных отверстий, их диаметры контролю не подлежат." at 0,0 h0
  text "TT0006#  7. Предельные отклонения размеров между осями двух любых отверстий, между осями двух любых контактных площадок ±0,05 мм, кроме оговоренных особо." at 0,0 h0
  text "TT0005#  6. Форма контактной площадки произвольная. Допускается занижение контактных площадок до 0,05 мм от края отверстия." at 0,0 h0
  text "TT0004#  5. Расстояние между элементами печатного рисунка не менее 0,125 мм." at 0,0 h0
  text "TT0003#  4. Ширина печатных проводников не менее 0,125 мм." at 0,0 h0
  text "TT0002#  3. Плату изгатовить по электронному документу ДФТВ.434519.003.101Д90" at 0,0 h0
  text "TT0001#  2. Печатная плата должна соответствовать ГОСТ Р 53429-2009, группе жесткости 3 при верхнем значении температуры окружающей среды (85±2)°С." at 0,0 h0
  text "TT0000#  1. Плату изготовить методом металлизации сквозных отверстий. Внутренние слои изготовить химическим методом." at 0,0 h0
  text "STAMP|Утвердил_дата|5.08.25" at 0,0 h0
  text "STAMP|Нормоконтроль_дата|5.08.25" at 0,0 h0
  text "STAMP|Проверил_дата|5.08.25" at 0,0 h0
  text "STAMP|Разработал_дата|5.08.25" at 0,0 h0
  text "2STAMP|Утвердил_дата|5.08.25" at 0,0 h0
  text "2STAMP|Нормоконтроль_дата|5.08.25" at 0,0 h0
  text "2STAMP|Проверил_дата|5.08.25" at 0,0 h0
  text "2STAMP|Разработал_дата|5.08.25" at 0,0 h0
  text "2STAMP|Утвердил|Флоренцев" at 0,0 h0
  text "2STAMP|Нормоконтроль|Марданова" at 0,0 h0
  text "2STAMP|Технолог_дата|5.08.25" at 0,0 h0
  text "2STAMP|Проверил|Бирюков" at 0,0 h0
  text "2STAMP|Разработал|Флоренцев" at 0,0 h0
  text "STAMP|Утвердил|Флоренцев" at 0,0 h0
  text "STAMP|Нормоконтроль|Марданова" at 0,0 h0
  text "STAMP|Проверил|Бирюков" at 0,0 h0
  text "STAMP|Разработал|Флоренцев" at 0,0 h0
  text "2STAMP|Литера3|А" at 0,0 h0
  text "2STAMP|Литера2|О₂" at 0,0 h0
  text "STAMP|Литера3|А" at 0,0 h0
  text "STAMP|Литера2|О₂" at 0,0 h0
  text "STAMP|Разработал|Флоренцев" at 0,0 h0
  text "STAMP|Проверил|Бирюков" at 0,0 h0
  text "STAMP|Нормоконтроль|Марданова" at 0,0 h0
  text "STAMP|Утвердил|Флоренцев" at 0,0 h0
  text "STAMP|Tech|" at 0,0 h0
  text "STAMP|Normo|Н.контр." at 0,0 h0
  text "STAMP|Check|Пров." at 0,0 h0
  text "STAMP|Design|Разраб." at 0,0 h0
  text "STAMP|Utv|Утв." at 0,0 h0
  text "STAMP|Обозначение|ДФТВ.434519.003.101" at 0,0 h0
  text "STAMP|Первичная применяемость|ДФТВ.434519.003" at 0,0 h0
  text "STAMP|Компания1|АО \"НПО КАДЕТЕК\"" at 0,0 h0
  text "STAMP|Наименование1|Плата печатная" at 0,0 h0
  text "STAMP|Материал1|Стеклотекстолит FR-4 1,5 мм" at 0,0 h0
  text "STAMP|Материал2|ГОСТ 26246.11-89" at 0,0 h0
  text "STAMP|Масса|20" at 0,0 h0
  text "STAMP|Lit|О₁" at 0,0 h0
  text "STAMP|Компания2|ОКБ ОЭиАР" at 0,0 h0
  text "2STAMP|Разработал|Флоренцев" at 0,0 h0
  text "2STAMP|Проверил|Бирюков" at 0,0 h0
  text "2STAMP|Техконтроль|Флоренцева" at 0,0 h0
  text "2STAMP|Нормоконтроль|Марданова" at 0,0 h0
  text "2STAMP|Утвердил|Флоренцев" at 0,0 h0
  text "2STAMP|Tech|Т.контр." at 0,0 h0
  text "2STAMP|Normo|Н.контр." at 0,0 h0
  text "2STAMP|Check|Пров." at 0,0 h0
  text "2STAMP|Design|Разраб." at 0,0 h0
  text "2STAMP|Utv|Утв." at 0,0 h0
  text "2STAMP|Обозначение|ДФТВ.434519.003СБ" at 0,0 h0
  text "2STAMP|Первичная применяемость|ДФТВ.434519.003" at 0,0 h0
  text "2STAMP|Компания1|АО \"НПО КАДЕТЕК\"" at 0,0 h0
  text "2STAMP|Наименование1|Демонстрационная плата" at 0,0 h0
  text "2STAMP|ТипДокумента|Сборочный чертеж" at 0,0 h0
  text "2STAMP|Lit|О₁" at 0,0 h0
  text "2STAMP|Наименование2|MDR1211FI Miluino" at 0,0 h0
  text "2STAMP|Компания2|ОКБ ОЭиАР" at 0,0 h0
  text "BOASVIADRILLTABLE:none,118110,305,|none,137795,36," at 0,0 h0
  text "2BOASDRILLTABLE:triangle,236220,Да,4,True,|smallquare,393701,Да,43,True,|hexagon,433071,Да,92,True,|none,1288188,Да,3,True," at 0,0 h0
Mechanical 8:
  drawing of 36 lines, arcs and shapes, not listed
Mechanical 9:
  drawing of 371 lines, arcs and shapes, not listed
  text "82,49" at 117.478,2502.906 h7.68
  text "поз.53" at 724.495,2499.858 h7.68
  text "47" at 638.262,2498.842 h10.75
  text "51" at 561.624,2498.334 h10.75
  text "57" at 576.798,2497.953 h10.75
  text "63" at 484.969,2497.699 h10.75
  text "49" at 504.752,2497.699 h10.75
  text "65" at 522.143,2497.699 h10.75
  text "3 отв." at 174.332,2480.681 h7.68
  text "3,27" at 189.009,2480.681 h7.68
  text "Паять по п.6 ТТ" at 729.194,2467.6 h7.68
  text "поз.47" at 691.094,2457.821 h7.68
  text "55" at 639.024,2457.44 h10.75
  text "поз. 69 и 71" at 785.201,2457.059 h7.68
  text "71" at 452.77,2450.582 h10.75
  text "51" at 524.413,2447.407 h10.75
  text "69" at 639.024,2425.944 h10.75
  text "Паять по п.6 ТТ" at 693.888,2415.276 h7.68
  text "Паять по п.6 ТТ" at 770.85,2415.276 h7.68
  text "70,1" at 29.855,2414.427 h7.68 r90
  text "51" at 639.913,2412.228 h10.75
  text "65" at 481.63,2338.314 h10.75
  text "49" at 502.466,2338.314 h10.75
  text "53" at 522.927,2338.314 h10.75
  text "61" at 539.541,2338.06 h10.75
  text "47" at 637.5,2335.266 h10.75
  text "Граница" at 600.162,2333.361 h7.68
  text "монтажа" at 600.162,2323.831 h7.68
  text "1,5" at 36.459,2305.261 h7.68 r90
  text "12,25*" at 458.353,2299.919 h7.68 r90
  text "1,5**" at 642.884,2277.125 h7.68 r90
  text "9,45*" at 458.607,2275.984 h7.68 r90
Mechanical 13:
  lines w0.18: 230,2253 295,2253 ; 230,2258 295,2258 ; 230,2263 295,2263 ; 230,2268 295,2268 ; 230,2273 295,2273 ; 230,2288 295,2288 ; 230,2293 295,2293 ; 230,2298 295,2298 ; 369.96,2268 369.96,2283 ; 374.98,2268 374.98,2283 ; 391.7,2522.1 394.8,2516.7 400.4,2526.5 ; 650,2253 715,2253 ; 650,2258 715,2258 ; 650,2263 715,2263 ; 650,2268 715,2268 ; 650,2273 715,2273 ; 650,2288 715,2288 ; 650,2293 715,2293 ; 650,2298 715,2298 ; 789.96,2268 789.96,2283 ; 794.98,2268 794.98,2283 ; 420,2243 840,2243 840,2540 420,2540 ; 420,2243 420,2540 ; 420,2243 420,2540 ; 420,2243 0,2243 0,2540 420,2540
  lines w0.6: 8,2273 20,2273 ; 8,2308 20,2308 ; 8,2333 20,2333 ; 8,2358 20,2358 ; 8,2475 20,2475 ; 13,2248 13,2393 ; 13,2415 13,2535 ; 20,2393 8,2393 8,2248 20,2248 ; 20,2415 8,2415 8,2535 20,2535 ; 20,2521 90,2521 90,2535 ; 230,2248 230,2303 415,2303 ; 230,2278 295,2278 ; 230,2283 295,2283 ; 237,2278 237,2303 ; 247,2248 247,2303 ; 270,2248 270,2303 ; 285,2248 285,2303 ; 295,2248 295,2303 415,2303 ; 295,2263 365,2263 415,2263 ; 295,2288 415,2288 ; 352,2524 357,2515 364.6,2529 ; 364.7,2529 407,2529 ; 365,2248 365,2288 ; 365,2268 415,2268 ; 365,2283 380,2283 415,2283 ; 380,2268 380,2288 ; 385.57,2263 385.57,2268 ; 397,2268 397,2288 ; 415,2311 415,2303 ; 428,2273 440,2273 ; 428,2308 440,2308 ; 428,2333 440,2333 ; 428,2358 440,2358 ; 428,2475 440,2475 ; 433,2248 433,2393 ; 433,2415 433,2535 ; 440,2393 428,2393 428,2248 440,2248 ; 440,2415 428,2415 428,2535 440,2535 ; 440,2521 510,2521 510,2535 ; 650,2248 650,2303 835,2303 ; 650,2278 715,2278 ; 650,2283 715,2283 ; 657,2278 657,2303 ; 667,2248 667,2303 ; 690,2248 690,2303 ; 705,2248 705,2303 ; 715,2248 715,2303 835,2303 ; 715,2263 785,2263 835,2263 ; 715,2288 835,2288 ; 785,2248 785,2288 ; 785,2268 835,2268 ; 785,2283 800,2283 835,2283 ; 800,2268 800,2288 ; 805.57,2263 805.57,2268 ; 817,2268 817,2288 ; 835,2311 835,2303 ; 20,2248 415,2248 415,2535 20,2535 ; 20,2248 20,2535 ; 440,2248 835,2248 835,2535 440,2535 ; 440,2248 440,2535
  text "ДФТВ.434519.003.101" at 87.697,2531.076 h10.75 r180
  text "ДФТВ.434519.003СБ" at 506.088,2531.076 h10.75 r180
  text "Ra 6,3" at 364.7,2516.7 h10.75
  text "(" at 388,2516.7 h10.75
  text ")" at 399,2516.7 h10.75
  text "Перв. примен." at 12.037,2494.974 h5.38 r90
  text "Перв. примен." at 432.037,2494.974 h5.38 r90
  text "ДФТВ.434519.003" at 18.037,2491.428 h5.38 r90
  text "ДФТВ.434519.003" at 438.037,2491.428 h5.38 r90
  text "Справ. №" at 12.037,2437.498 h5.38 r90
  text "Справ. №" at 432.037,2437.498 h5.38 r90
  text "Подп. и дата" at 12.037,2365.566 h5.38 r90
  text "Подп. и дата" at 432.037,2365.566 h5.38 r90
  text "Инв. № дубл." at 12.037,2336.08 h5.38 r90
  text "Инв. № дубл." at 432.037,2336.08 h5.38 r90
  text "1. Плату изготовить методом металлизации сквозных отверстий. Внутренние слои изготовить химическим методом. /   2. Печатная плата должна соответствовать ГОСТ Р 53429-2009, группе жесткости 3 при верхнем значении температуры окружающей среды (85±2)°С. /   3. Плату изгатовить по электронному документу ДФТВ.434519.003.101Д90 /   4. Ширина печатных проводников не менее 0,125 мм. /   5. Расстояние между элементами печатного рисунка не менее 0,125 мм. /   6. Форма контактной площадки произвольная. Допускается занижение контактных площадок до 0,05 мм от края отверстия. /   7. Предельные отклонения размеров между осями двух любых отверстий, между осями двух любых контактных площадок ±0,05 мм, кроме оговоренных особо. /   8. Допускается полное или частичное заполнение припоем переходных отверстий, их диаметры контролю не подлежат. /   9. Покрытие печатной платы маска Imagecure XV501T-4, цвет черный матовый, фирма «SUN CHEMIKAL», с отвердителем CAWN2539,  с двух сторон, кроме контактных площадок и монтажных отверстий. Допускается отсутствие покрытия вокруг контактных площадок на размере не более 0,125 мм и между контактными площадками при расстоянии между ними менее 0,125 мм. /   10. Маркировать маской Imagecure XV501T-4, цвет белый, фирма «SUN CHEMIKAL», с отвердителем CAWP2431. Попадание маркировочной краски на паяемые поверхности не допускается. /   Допускаются разрывы в маркировочных знаках, не искажающие восприятие информации. /   11. Остальные ТТ по ОСТ4 Г0.070.015." at 235,2323 h7.68
  text "1. Установку элементов производить по чертежу. /   2.* Размеры для справок. /   3.** Размеры обеспеч. инстр. /   4. Меры защиты от статического электричества по ОСТ 92-1615-74. Степень жесткости II по ОСТ11.073.062-2001. /   5. Элементы поверхностного монтажа паять паяльной пастой АВАНГАРД ПП-63-4-89СН0 ТУ 3439-002-07518266-2017. /   6. Элементы выводного монтажа поз. 47-57, 61-65, 69 и 71 паять проволокой ф0,5 мм. ПОС61 ГОСТ 21931-76 с применением флюса ФТС по ОСТ 4Г.0.033.200 объемом не более 2 мкл на точку пайки." at 655,2323 h7.68
  text "Взам. инв. №" at 12.037,2311.101 h5.38 r90
  text "Взам. инв. №" at 432.037,2311.101 h5.38 r90
  text "ДФТВ.434519.003.101" at 322.303,2292.424 h10.75
  text "ДФТВ.434519.003СБ" at 743.912,2292.424 h10.75
  text "Лит." at 369.194,2283.963 h5.38
  text "Масса" at 383.914,2283.963 h5.38
  text "Масштаб" at 398.834,2283.963 h5.38
  text "Лит." at 789.194,2283.963 h5.38
  text "Масса" at 803.914,2283.963 h5.38
  text "Масштаб" at 818.834,2283.963 h5.38
  text "Подп. и дата" at 12.037,2281.066 h5.38 r90
  text "Подп. и дата" at 432.037,2281.066 h5.38 r90
  text "Демонстрационная плата" at 721.032,2280.803 h7.68
  text "Изм." at 230.571,2278.963 h5.38
  text "Лист" at 237.856,2278.963 h5.38
  text "№ докум." at 251.998,2278.963 h5.38
  text "Подп." at 273.772,2278.963 h5.38
  text "Дата" at 285.793,2278.963 h5.38
  text "Изм." at 650.571,2278.963 h5.38
  text "Лист" at 657.856,2278.963 h5.38
  text "№ докум." at 671.998,2278.963 h5.38
  text "Подп." at 693.772,2278.963 h5.38
  text "Дата" at 705.793,2278.963 h5.38
  text "Плата печатная" at 311.59,2276.803 h7.68
  text "5.08.25" at 285.958,2274.402 h3.84
  text "5.08.25" at 705.958,2274.402 h3.84
  text "Разраб." at 230.533,2273.771 h5.38
  text "Флоренцев" at 247.68,2273.771 h5.38
  text "Разраб." at 650.533,2273.771 h5.38
  text "Флоренцев" at 667.68,2273.771 h5.38
  text "О₁" at 365.751,2273.303 h7.68
  text "О₂" at 370.613,2273.303 h7.68
  text "А" at 376.092,2273.303 h7.68
  text "20" at 385.4,2273.303 h7.68
  text "2:1" at 402.788,2273.303 h7.68
  text "О₁" at 785.751,2273.303 h7.68
  text "О₂" at 790.613,2273.303 h7.68
  text "А" at 796.092,2273.303 h7.68
  text "2:1" at 822.788,2273.303 h7.68
  text "MDR1211FI Miluino" at 731.337,2272.803 h7.68
  text "5.08.25" at 285.958,2269.402 h3.84
  text "5.08.25" at 705.958,2269.402 h3.84
  text "Пров." at 230.533,2268.771 h5.38
  text "Бирюков" at 247.68,2268.771 h5.38
  text "Пров." at 650.533,2268.771 h5.38
  text "Бирюков" at 667.68,2268.771 h5.38
  text "Сборочный чертеж" at 735.512,2265.463 h5.38
  text "5.08.25" at 705.958,2264.402 h3.84
  text "Лист" at 366.442,2263.771 h5.38
  text "Листов" at 387.485,2263.771 h5.38
  text "1" at 407.397,2263.771 h5.38
  text "Т.контр." at 650.533,2263.771 h5.38
  text "Флоренцева" at 667.68,2263.771 h5.38
  text "Лист" at 786.442,2263.771 h5.38
  text "Листов" at 807.485,2263.771 h5.38
  text "1" at 827.397,2263.771 h5.38
  text "Стеклотекстолит FR-4 1,5 мм" at 306.118,2256.963 h5.38
  text "АО \"НПО КАДЕТЕК\"" at 369.271,2256.303 h7.68
  text "АО \"НПО КАДЕТЕК\"" at 789.271,2256.303 h7.68
  text "5.08.25" at 285.958,2254.402 h3.84
  text "5.08.25" at 705.958,2254.402 h3.84
  text "Н.контр." at 230.533,2253.771 h5.38
  text "Марданова" at 247.68,2253.771 h5.38
  text "Н.контр." at 650.533,2253.771 h5.38
  text "Марданова" at 667.68,2253.771 h5.38
  text "Инв. № подл." at 12.037,2251.08 h5.38 r90
  text "Инв. № подл." at 432.037,2251.08 h5.38 r90
  text "ГОСТ 26246.11-89" at 316.045,2250.463 h5.38
  text "ОКБ ОЭиАР" at 377.751,2250.303 h7.68
  text "ОКБ ОЭиАР" at 797.751,2250.303 h7.68
  text "5.08.25" at 285.958,2249.402 h3.84
  text "5.08.25" at 705.958,2249.402 h3.84
  text "Утв." at 230.533,2248.771 h5.38
  text "Флоренцев" at 247.68,2248.771 h5.38
  text "Утв." at 650.533,2248.771 h5.38
  text "Флоренцев" at 667.68,2248.771 h5.38
  text "Копировал" at 305.533,2243.771 h5.38
  text "Формат А3" at 386.274,2243.771 h5.38
  text "Копировал" at 725.533,2243.771 h5.38
  text "Формат А3" at 806.274,2243.771 h5.38

## Text inside footprints (layer, text, board x,y; h text height)
ZBOAS1837092440: Mechanical 7 "R1" at 506.744,2403.878 h4; Mechanical 7 "R2" at 494.88,2426.23 h4; Mechanical 7 "R3" at 503.886,2403.878 h4; Mechanical 7 "R4" at 495.091,2423.436 h4; Mechanical 7 "R5" at 494.895,2420.642 h4; Mechanical 7 "R14" at 595.185,2427.754 h4; Mechanical 7 "R15" at 613.277,2415.562 h4; Mechanical 7 "C1" at 511.712,2404.132 h4; Mechanical 7 "C2" at 516.611,2404.132 h4; Mechanical 7 "C3" at 514.188,2404.132 h4; Mechanical 7 "C5" at 571.999,2415.816 h4; Mechanical 7 "C4" at 532.57,2419.372 h4; Mechanical 7 "C6" at 532.458,2429.532 h4; Mechanical 7 "C7" at 494.953,2429.278 h4; Mechanical 7 "C9" at 495.016,2417.848 h4; Mechanical 7 "C12" at 474.465,2429.532 h4; Mechanical 7 "C14" at 474.676,2422.166 h4; Mechanical 7 "C15" at 596.147,2462.552 h4; Mechanical 7 "C16" at 604.612,2427.754 h4; Mechanical 7 "C18" at 613.438,2422.166 h4; Mechanical 7 "C19" at 604.508,2398.29 h4; Mechanical 7 "C21" at 592.51,2427.754 h4; Mechanical 7 "C22" at 586.488,2408.45 h4; Mechanical 7 "C23" at 613.274,2419.626 h4; Mechanical 7 "C20" at 599.943,2443.756 h4; Mechanical 7 "C24" at 592.795,2443.756 h4; Mechanical 7 "ZQ2" at 483.149,2425.784 h4; Mechanical 7 "ZQ3" at 596.285,2435.882 h4; Mechanical 7 "XP4" at 559.551,2395.202 h4; Mechanical 7 "XP2" at 519.87,2355.872 h4; Mechanical 7 "XS2" at 486.95,2465.092 h4; Mechanical 7 "XS1" at 527.771,2465.092 h4; Mechanical 7 "XS3" at 492.147,2368.572 h4; Mechanical 7 "XS4" at 541.009,2368.572 h4; Mechanical 7 "XP8" at 616.5,2442.242 h4; Mechanical 7 "XP5" at 624.125,2418.062 h4; Mechanical 7 "XP7" at 598.682,2470.172 h4; Mechanical 7 "XP3" at 546.757,2418.102 h4; Mechanical 7 "C17" at 597.841,2427.754 h4; Mechanical 7 "C28" at 607.604,2369.588 h4; Mechanical 7 "C26" at 587.094,2352.062 h4; Mechanical 7 "C27" at 607.502,2367.048 h4; Mechanical 7 "C25" at 587.011,2354.602 h4; Mechanical 7 "DA2" at 591.852,2364 h4; Mechanical 7 "XS5" at 621.115,2392.702 h4; Mechanical 7 "XP1" at 520.051,2477.792 h4; Mechanical 7 "C8" at 494.04,2439.946 h4; Mechanical 7 "C10" at 547.61,2437.914 h4; Mechanical 7 "C11" at 474.646,2439.946 h4; Mechanical 7 "C13" at 494.648,2415.308 h4; Mechanical 7 "DA1" at 556.727,2432.58 h4; Mechanical 7 "HL1" at 550.239,2401.338 h4; Mechanical 7 "HL2" at 550.059,2404.386 h4; Mechanical 7 "HL3" at 550.176,2407.434 h4; Mechanical 7 "HL4" at 550.27,2410.482 h4; Mechanical 7 "HL5" at 615.227,2361.547 h4; Mechanical 7 "R10" at 505.813,2441.47 h4; Mechanical 7 "R6" at 544.762,2401.338 h4; Mechanical 7 "R7" at 544.596,2404.386 h4; Mechanical 7 "R8" at 544.699,2407.434 h4; Mechanical 7 "R9" at 544.658,2410.482 h4; Mechanical 7 "R11" at 616.998,2462.298 h4; Mechanical 7 "R12" at 616.818,2459.25 h4; Mechanical 7 "R13" at 616.934,2456.202 h4; Mechanical 7 "R16" at 613.36,2412.26 h4; Mechanical 7 "R17" at 613.194,2409.466 h4; Mechanical 7 "R18" at 593.485,2398.036 h4; Mechanical 7 "R19" at 607.598,2360.444 h4; Mechanical 7 "R20" at 607.351,2364 h4; Mechanical 7 "R21" at 590.591,2398.036 h4; Mechanical 7 "R22" at 595.998,2398.036 h4; Mechanical 7 "R23" at 595.353,2386.86 h4; Mechanical 7 "R24" at 586.303,2414.546 h4; Mechanical 7 "R25" at 599.061,2398.036 h4; Mechanical 7 "R26" at 600.415,2386.86 h4; Mechanical 7 "SB1" at 571.078,2402.254 h4; Mechanical 7 "SB2" at 570.898,2436.49 h4; Mechanical 7 "VD1" at 611.918,2459.25 h4; Mechanical 7 "VT1" at 597.657,2381.326 h4; Mechanical 7 "ZQ1" at 484.019,2446.804 h4; Mechanical 7 "XP6" at 587.419,2462.552 h4; Mechanical 7 "XP10" at 618.573,2480.307 h4; Mechanical 7 "XP11" at 618.761,2353.307 h4; Mechanical 7 "DD1" at 511.586,2421.962 h4; Mechanical 7 "DD2" at 598.438,2414.663 h4